# EAGLE board ignition test (EAGLE 7.2.0)
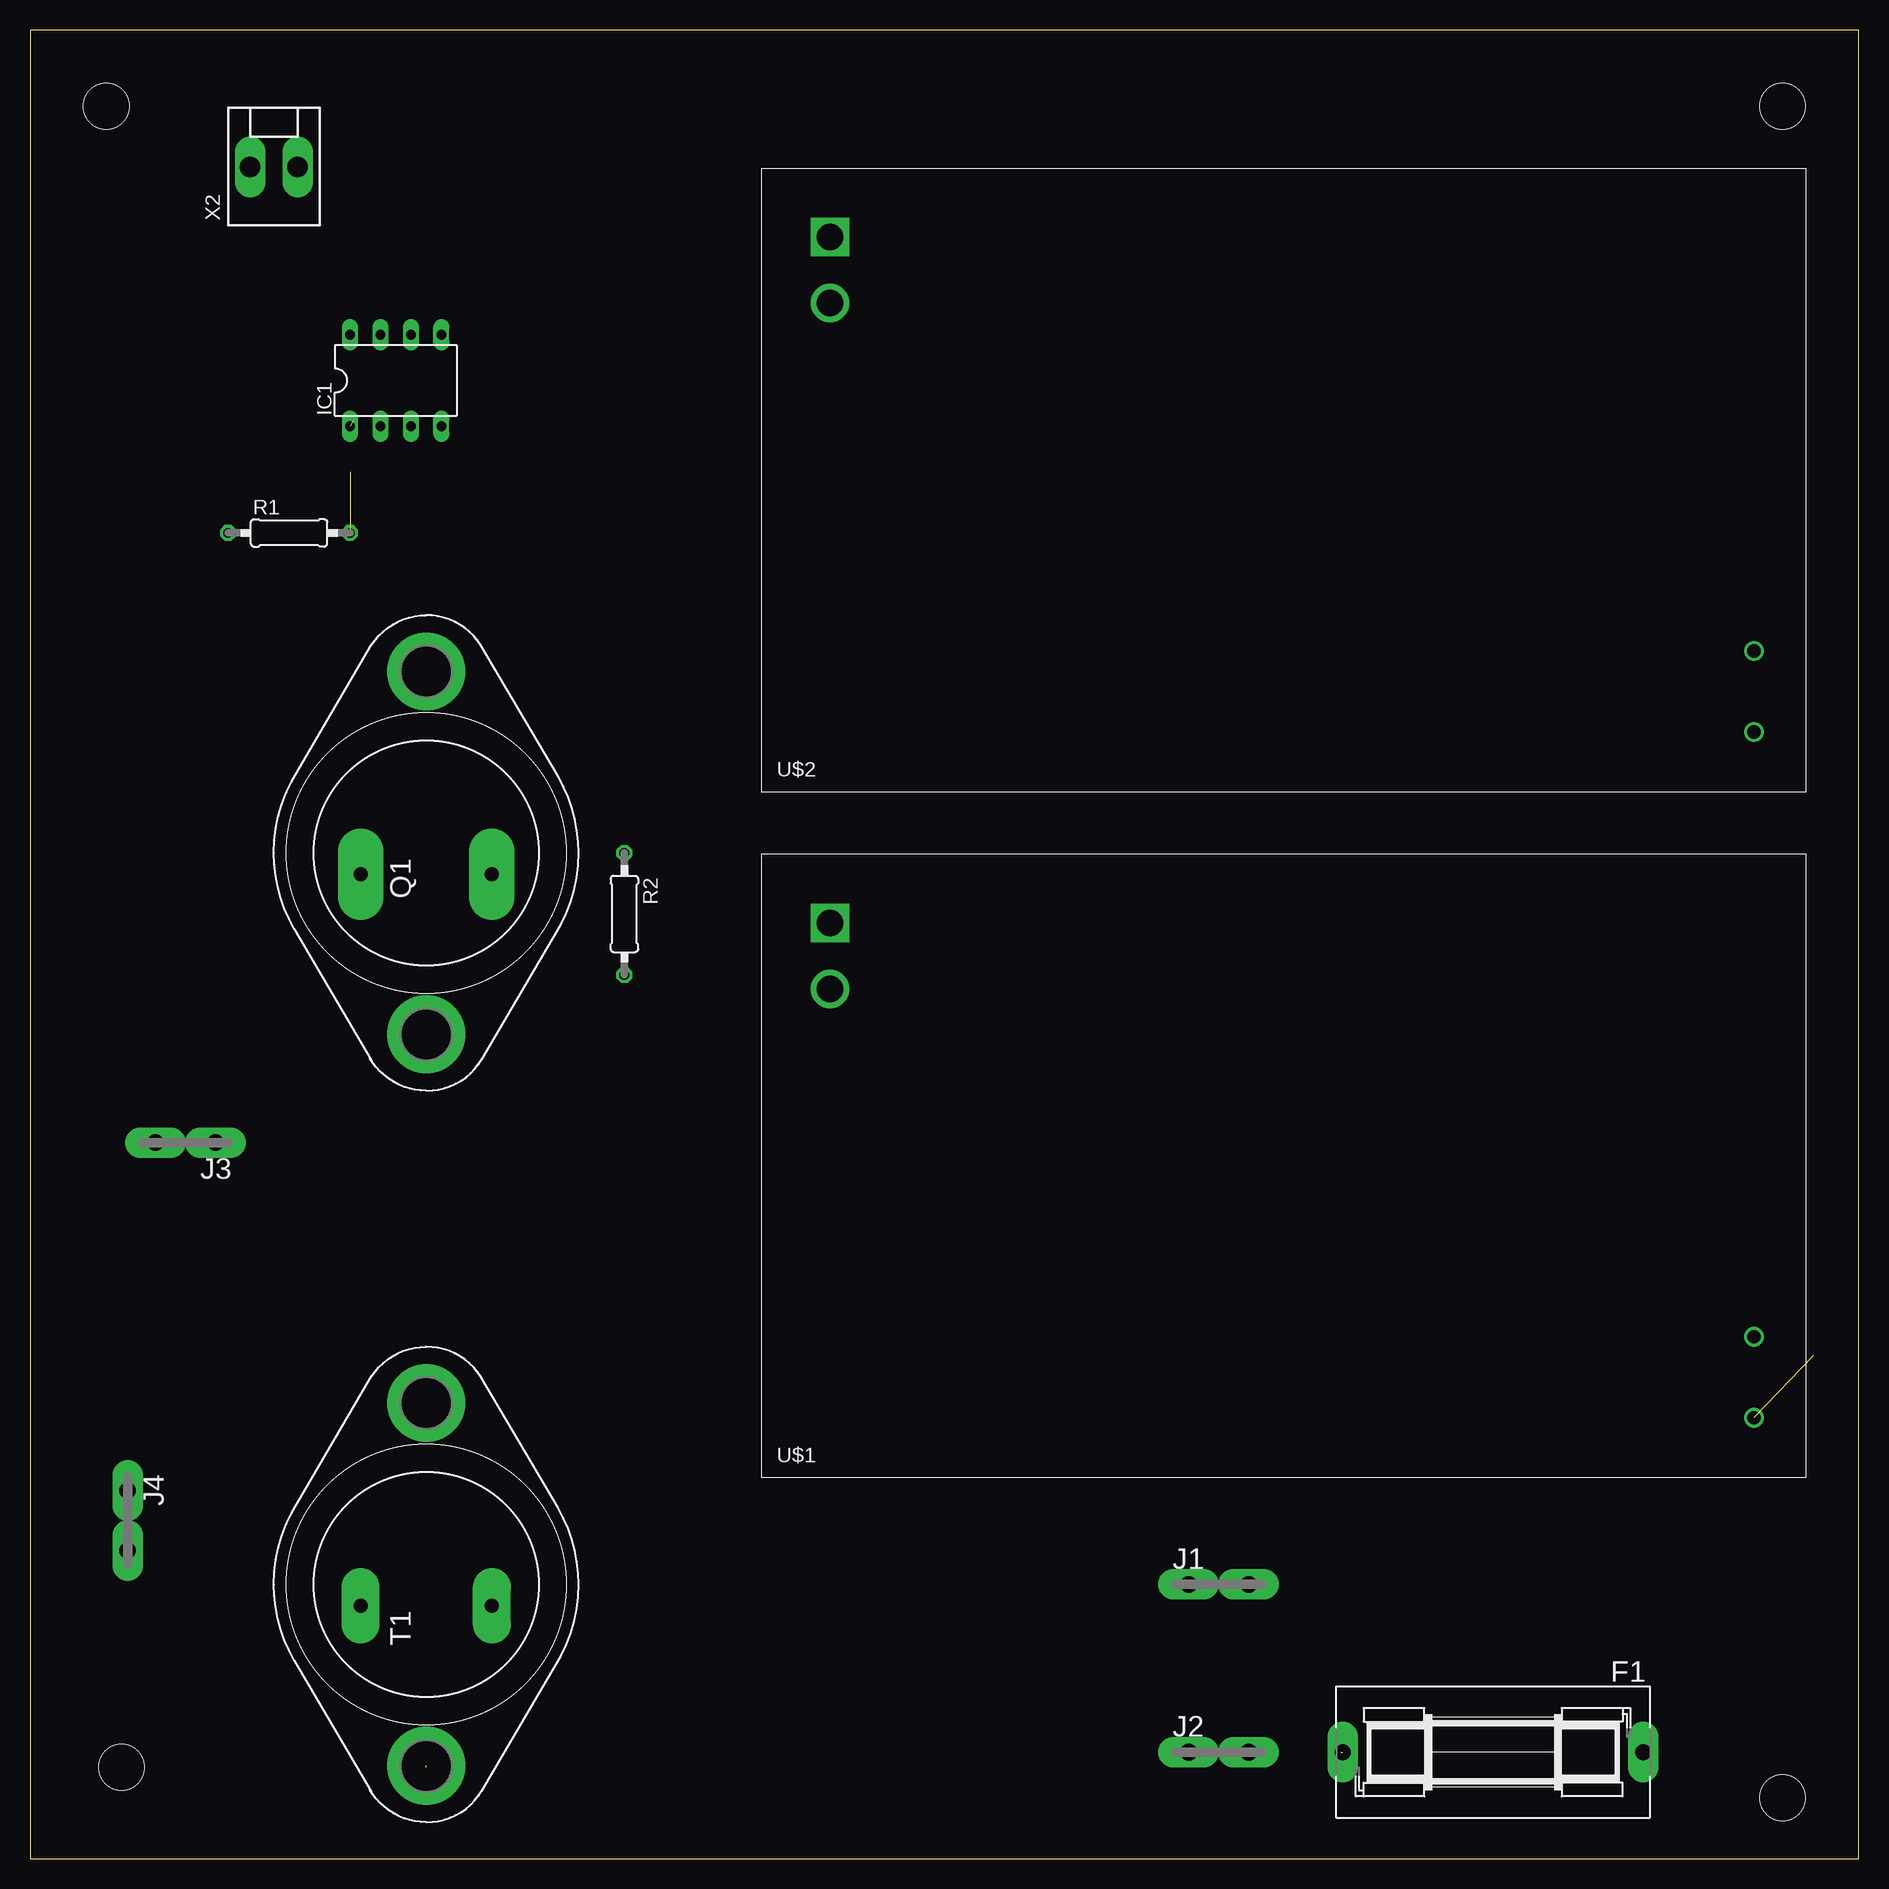
[diagram p0: board, top side]
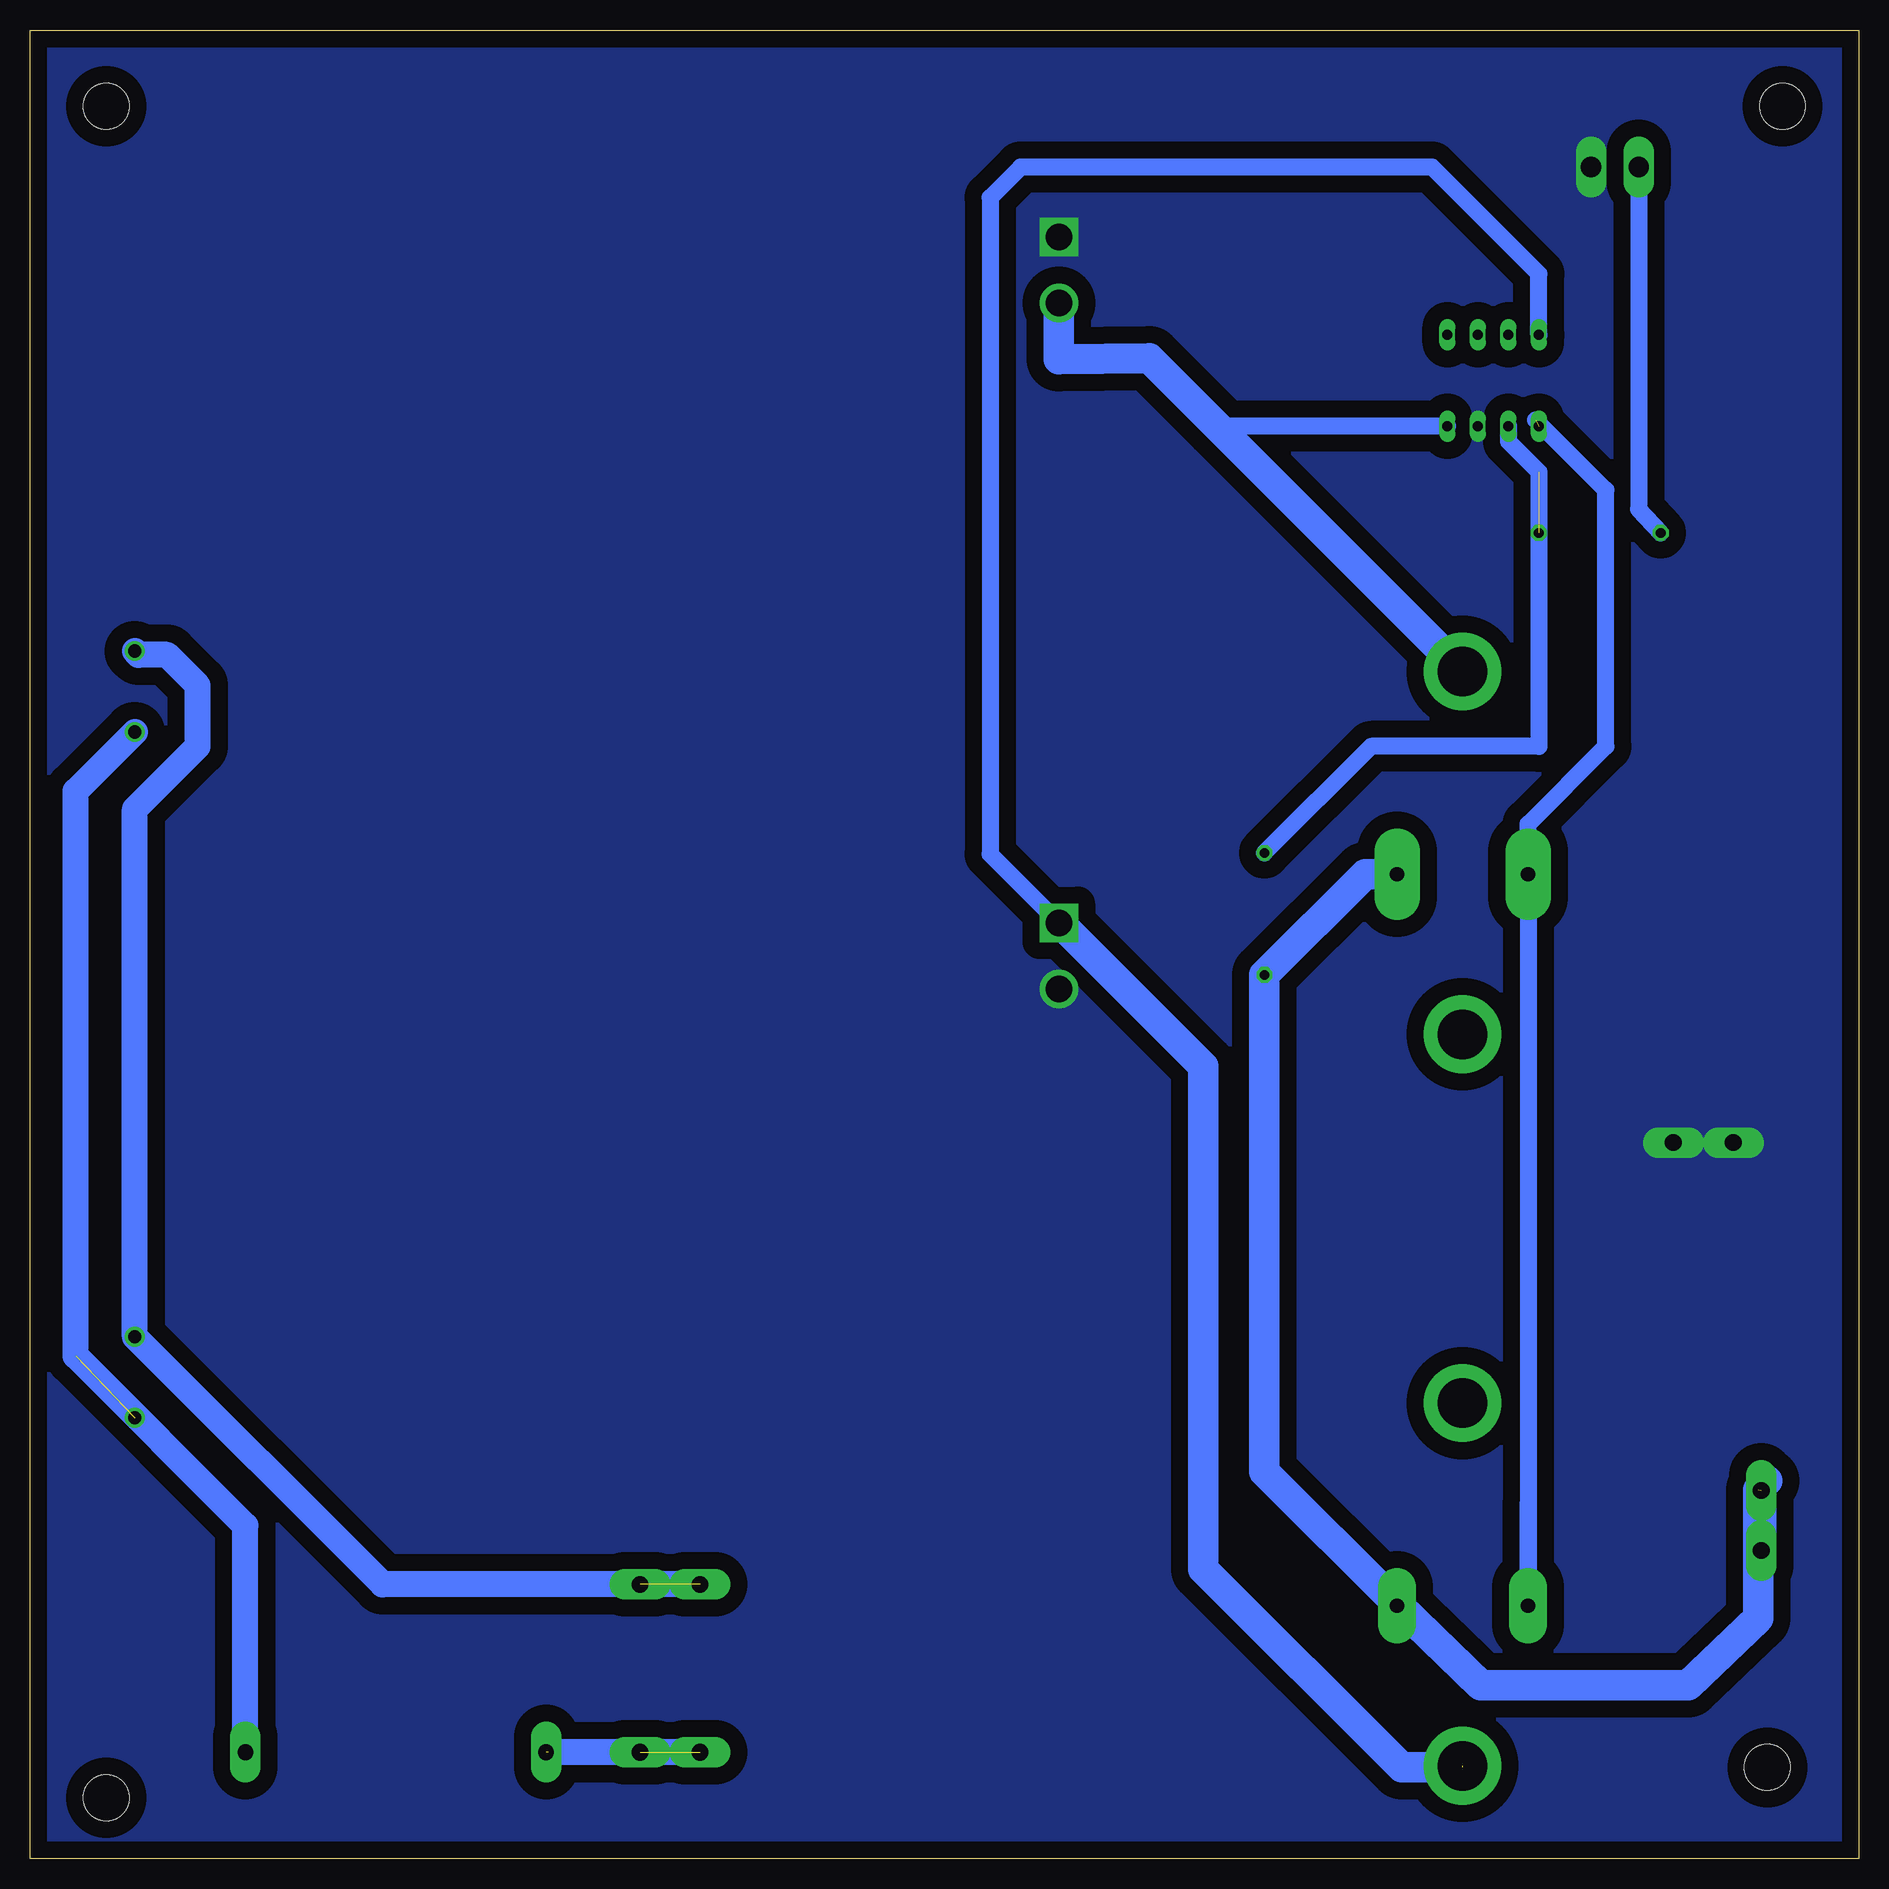
[diagram p1: board, bottom side, seen from below]

Size 152.4 x 152.4 mm. Coordinates in mm from the lower left corner, seen from the top.
Outline: 0,0 152.4,0 152.4,152.4 0,152.4 0,0
Copper layers (1*16): Top 0.035mm / dielectric 1.5mm / Bottom 0.035mm
Design rules "default": minimum track width 10mil, minimum drill 24mil, track to track 8mil, track to pad 8mil, pad to pad 8mil, via to via 8mil, smd to smd 8mil, copper to edge 40mil, drill to drill 8mil, minimum pad ring 10mil, minimum via ring 8mil, stop-mask expansion 4mil, vias tented up to drill 0mil, thermal gap 10mil
Holes 3.8 mm at 146.05,5.08 6.35,146.05 7.62,7.62 146.05,146.05

## Footprints (pad centres in the part's own frame; a part is rotated, then mirrored left to right if it is on the bottom)
SH25 = drill 1.321 pad 2.54 long: 1 -12.522,0; 2 12.522,0
DIL08 = drill 0.813 long: 1 -3.81,-3.81; 2 -1.27,-3.81; 3 1.27,-3.81; 4 3.81,-3.81; 5 3.81,3.81; 6 1.27,3.81; 7 -1.27,3.81; 8 -3.81,3.81
F061.100 = drill 1.4 pad 2.54 long: A1 -2.5,0; A2 2.5,0
TO3 = drill 1.194 pad 3.81 long: B -1.778,5.461; E -1.778,-5.461 | drill 4.115 pad 6.477: C 15.113,0; C/ -15.113,0
0207/10 = drill 0.813 octagon: 1 -5.08,0; 2 5.08,0
TO3' = drill 1.194 pad 3.15 long: B -1.778,5.461; E -1.778,-5.461 | drill 4.115 pad 6.477: C 15.113,0; C/ -15.113,0
IRM-60-12 = drill 2.2 square: P$1 5.7,46.25 | drill 2.2: P$2 5.7,40.75 | drill 1.1: P$3 82.7,5; P$4 82.7,11.75
KK-156-2 = drill 1.7 pad 2.184 long: 1 -1.98,0; 2 1.98,0

## Placement (x,y rotation side)
F1  [SH25]  121.92,8.89 180 top
IC1  LM358N  [DIL08]  30.48,123.19 0 top
J1  PIN2F061.100  [F061.100]  99.06,22.86 0 top
J2  PIN2F061.100  [F061.100]  99.06,8.89 0 top
J3  PIN2F061.100  [F061.100]  12.95,59.69 180 top
J4  PIN2F061.100  [F061.100]  8.13,28.19 270 top
Q1  MJ2955  [TO3]  33.02,83.82 90 top
R1  10k  [0207/10]  21.59,110.49 0 top
R2  10k  [0207/10]  49.53,78.74 270 top
T1  2N3055  [TO3']  33.02,22.86 90 top
U$1  IRM-60-12  [IRM-60-12]  60.96,31.75 0 top
U$2  IRM-60-12  [IRM-60-12]  60.96,88.9 0 top
X2  [KK-156-2]  20.32,140.97 0 top

## Library data of the parts
F1 = fuse; MF: SCHURTER; MPN: 0031.8211; OC_FARNELL: 1162741; OC_NEWARK: 96B9380
IC1 = linear
J1-J4 = con-faston; OC_FARNELL: unknown; OC_NEWARK: unknown
Q1 = transistor-pnp
R1 R2 = resistor
T1 = transistor
U$1 U$2 = meanwell
X2 = con-molex; OC_FARNELL: unknown; OC_NEWARK: unknown

## Nets
+12V: IC1.8 T1.C T1.C/ U$1.P$1
-12V: IC1.4 Q1.C Q1.C/ U$2.P$2
GND: IC1.3 J3.A1 J3.A2 U$1.P$2 U$2.P$1 X2.2
L: F1.1 U$1.P$3 U$2.P$3
N: J1.A1 J1.A2 U$1.P$4 U$2.P$4
N$1: IC1.2 R1.2 R2.1
N$3: J4.A1 J4.A2 Q1.E R2.2 T1.E
N$4: R1.1 X2.1
N$5: F1.2 J2.A1 J2.A2
N$6: IC1.1 Q1.B T1.B

## Tracks (layer width: path | path; a pad name or v marks a point on that pad's centre or on a via)
+12V  (1 unrouted)
  Bottom 1.422: IC1.8 26.67,132.08 35.56,140.97 69.85,140.97 72.39,138.43 72.39,83.73 U$1.P$1 | 32.89,38.1 T1.C
  Bottom 2.184: U$1.P$1 66.57,78
  Bottom 2.54: 66.57,78 54.61,66.04 54.61,24.13 38.1,7.62 33.02,7.62
-12V
  Bottom 1.422: IC1.4 53.47,119.38
  Bottom 2.54: U$2.P$2 66.66,124.95 59.12,125.03 53.47,119.38 Q1.C
GND
  pour Bottom (isolate 1.422, no thermals): 0,152.4 152.4,152.4 152.4,0 0,0
L  (1 unrouted)
  Bottom 2.184: U$2.P$3 148.59,88.97 148.59,41.91 134.44,27.76 F1.1
N  (1 unrouted)
  Bottom 2.184: J1.A1 123.02,22.86 U$1.P$4 143.66,87.48 138.43,92.71 138.43,97.79 140.97,100.33 143.34,100.33 U$2.P$4
N$1  (1 unrouted)
  Bottom 1.422: R2.1 40.64,92.71 26.67,92.71 26.67,115.57 29.21,118.11 IC1.2
N$3  (1 unrouted)
  Bottom 1.422: 38.35,21.08 T1.E 38.48,21.21
  Bottom 2.54: Q1.E 41.15,82.04 R2.2 49.53,32.26 38.48,21.21 | J4.A2 J4.A1 | 38.35,21.08 31.5,14.48 14.22,14.48 8.38,20.07 8.38,30.73 7.62,31.5
N$4
  Bottom 1.422: X2.1 18.34,112.47 R1.1
N$5  (2 unrouted)
  Bottom 2.184: J2.A1 109.22,8.89
N$6  (1 unrouted)
  Bottom 1.422: 27.56,29.59 T1.B Q1.B 27.56,86.23 21.08,92.71 21.08,114.05 26.92,119.89